# Altium PCB D.PcbDoc
Units mil, origin at the board's own origin, x right, y up, seen from the top; angles counter-clockwise.
Board outline 3945 x 3690 mil, 2 copper layers (Top Layer, Bottom Layer); 79 components, 105 nets, 365 pads, 0 vias.
Unrouted connection lines stored in the file: 229.
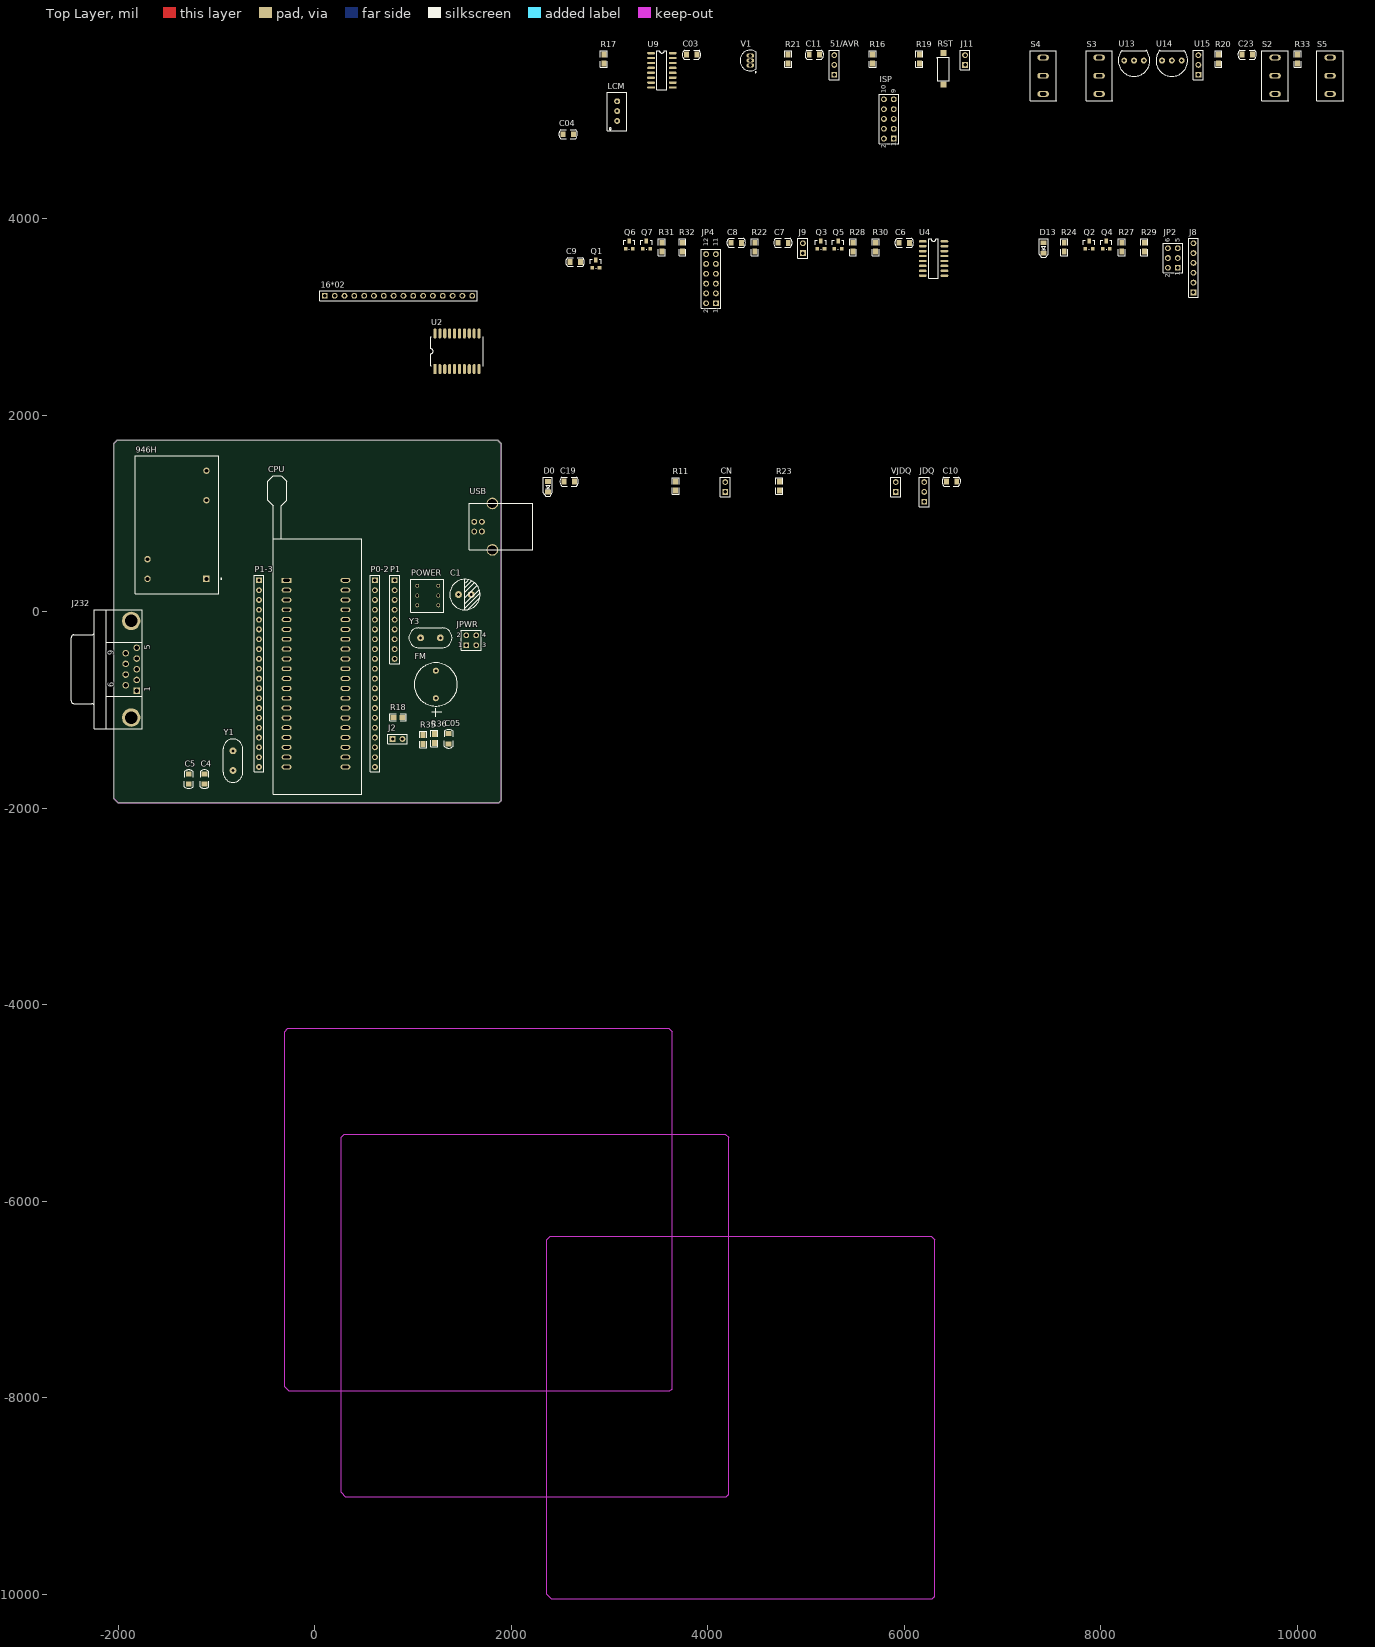
[diagram p0: Top Layer view]
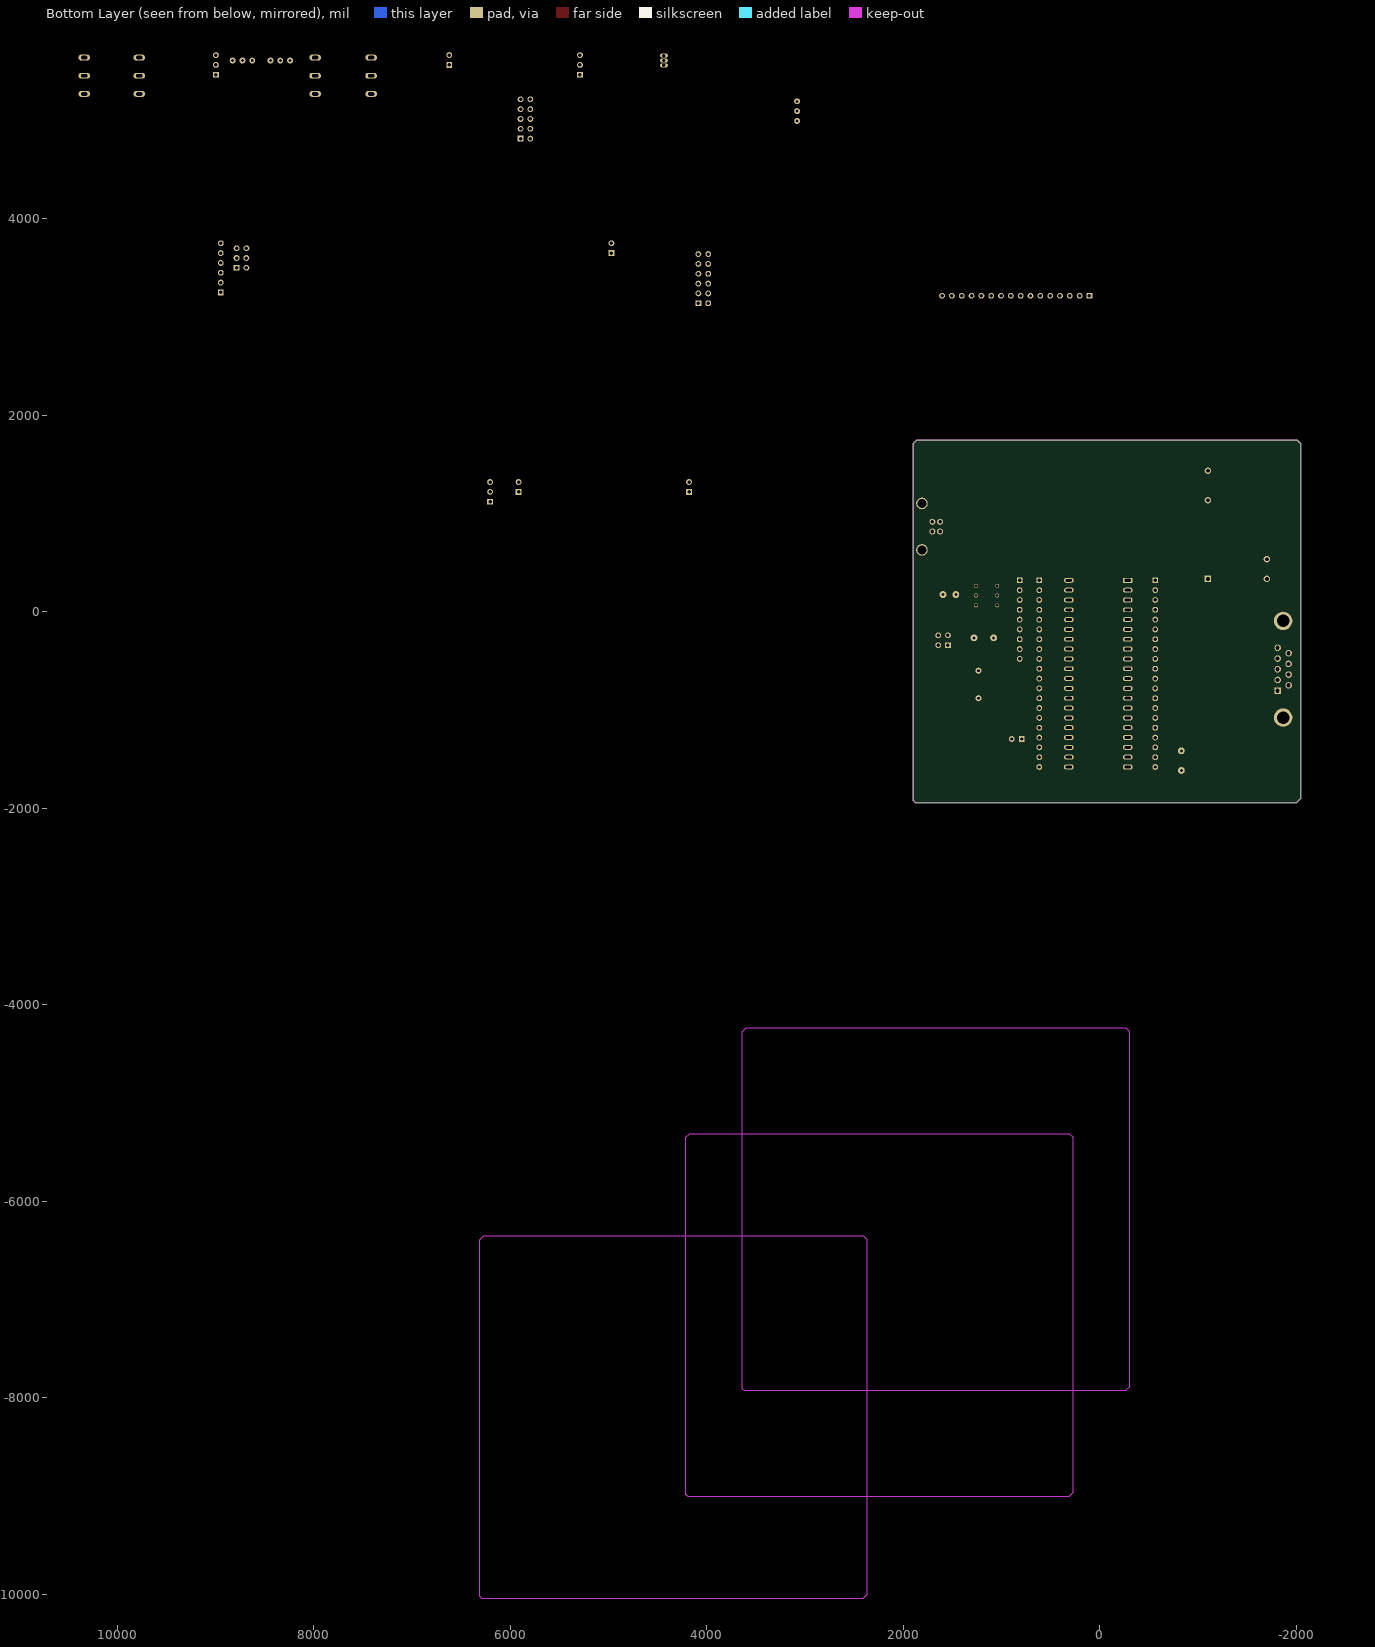
[diagram p1: Bottom Layer view, seen from below]

## Layer stack, top to bottom
Top Layer: signal copper 1.4
Dielectric: dielectric 12.6, FR-4, Dk 4.8
Bottom Layer: signal copper 1.4

## Board outline
-2010,1745 1865,1745 1900,1710 1900,-1925 1895,-1925 1875,-1945 -2000,-1945 -2045,-1900 -2045,1710 -2010,1745

## Design rules (kind name [scope] priority, off if disabled: settings)
Clearance [All] p1: gap=10
PolygonConnect [All] p1: connectstyle=Relief reliefconductorwidth=10 reliefentries=4 polygonreliefangle="90 Angle" airgapwidth=10
RoutingVias [All] p1: holewidth=28 width=50 viastyle="Through Hole" minholewidth=28 minwidth=50 maxholewidth=28 maxwidth=50
SolderMaskExpansion [All] p1: expansion=4
Width [All] p1: maxlimit=10 minlimit=10 preferedwidth=10
28 further rules are at their usual default settings.

## Components (designator, comment, footprint, x,y, rotation, side; value= is the part's Value field where it differs from the comment)
16*02 "Header 16" HDR1X16 105,3215 r0 top
51/AVR "CON3" HDR1X3 5290,5465 r90 top
946H "946H" MODULE5B -1400,885 r90 top
C1 "CAPD" RB470U 1530,175 r0 top
C03 "22" 0805C 3785,5670 r0 top
C4 "22" 0805C -1120,-1755 r90 top
C04 "22" 0805C 2530,4860 r0 top
C5 "22" 0805C -1280,-1755 r90 top
C05 "104" 0805C 1365,-1345 r90 top
C6 "" 0805C 5950,3755 r0 top
C7 "" 0805C 4715,3755 r0 top
C8 "" 0805C 4240,3755 r0 top
C9 "" 0805C 2600,3560 r0 top
C10 "" 0805C 6430,1325 r0 top
C11 "104" 0805C 5035,5670 r0 top
C19 "" 0805C 2540,1325 r0 top
C23 "104" 0805C 9440,5670 r0 top
CN "DC_JACK" HDR1X2 4180,1220 r90 top
CPU "AT89C51" DIP40紧锁座 -285,320 r0 top
D0 "POW_LED" 0805-LED 2375,1325 r90 top
D13 "LED" 0805-LED 7420,3755 r90 top
FM "BELL" BELL 1235,-880 r270 top
ISP "Header 5X2" HDR2X5 5895,4815 r90 top
J2 "CON2" HDR1X2 795,-1295 r0 top
J8 "MOTO1" HDR1X6 8945,3250 r90 top
J9 "MOTO2" HDR1X2 4970,3650 r90 top
J11 "HW" HDR1X2 6620,5565 r90 top
J232 "DB 9" DSUB1.385-2H9 -2240,-585 r90 top
JDQ "A COM B" HDR1X3 6205,1120 r90 top
JP2 "COM" HDR2X3 8785,3500 r90 top
JP4 "Header 6X2" HDR2X6 4085,3140 r90 top
JPWR "Header 2X2" HDR2X2 1545,-340 r0 top
LCM "滑动变阻器" 滑动变阻器 3080,4995 r90 top
P0-2 "CON20" HDR1X20 615,320 r270 top
P1 "10k" HDR1X9 815,320 r270 top
P1-3 "CON20" HDR1X20 -565,320 r270 top
POWER "自锁开关" 自锁开关 1045,265 r0 top
Q1 "8550" SOT-23 2825,3500 r0 top
Q2 "9012" SOT-23 7845,3695 r0 top
Q3 "9012" SOT-23 5115,3695 r0 top
Q4 "9012" SOT-23 8020,3695 r0 top
Q5 "9012" SOT-23 5290,3695 r0 top
Q6 "9012" SOT-23 3165,3695 r0 top
Q7 "9012" SOT-23 3340,3695 r0 top
R11 "1K" 0805 3675,1235 r90 top
R16 "470" 0805 5680,5580 r90 top
R17 "10K" 0805 2945,5580 r90 top
R18 "1k" 0805 895,-1075 r180 top
R19 "10k" 0805 6155,5580 r90 top
R20 "10k" 0805 9200,5580 r90 top
R21 "1K" 0805 4820,5580 r90 top
R22 "20R" 0805 4480,3665 r90 top
R23 "20R" 0805 4730,1235 r90 top
R24 "1K" 0805 7630,3665 r90 top
R27 "20R" 0805 8215,3665 r90 top
R28 "20R" 0805 5480,3665 r90 top
R29 "20R" 0805 8445,3665 r90 top
R30 "20R" 0805 5710,3665 r90 top
R31 "20R" 0805 3535,3665 r90 top
R32 "20R" 0805 3745,3665 r90 top
R33 "100" 0805 10005,5580 r90 top
R35 "470" 0805 1105,-1345 r90 top
R36 "470" 0805 1220,-1335 r90 top
RST "SW" SWD 6400,5365 r90 top
S2 "Sa" 拨动开关 9775,5640 r0 top
S3 "Sa" 拨动开关 7985,5640 r0 top
S4 "Sa" 拨动开关 7415,5640 r0 top
S5 "Sa" 拨动开关 10335,5640 r0 top
U2 "74573" SO20W 1225,2470 r90 top
U4 "MAX232" SO-16 6190,3770 r0 top
U9 "CH340G" SO-16 3425,5685 r0 top
U13 "DS18B20" DS18B20 8240,5610 r0 top
U14 "DS18B20" DS18B20 8625,5610 r0 top
U15 "HONGWAI" HDR1X3 8995,5465 r90 top
USB "USB" USB-B 1625,915 r180 top
V1 "NPN" TO-226-AA 4435,5610 r0 top
VJDQ "CON2" HDR1X2 5915,1220 r90 top
Y1 "CRYSTAL" XTAL -830,-1515 r90 top
Y3 "12MHZ" XTAL 1180,-265 r180 top

## Footprints (in the part's own frame and the unit in brackets; to place one, negate y for a bottom-side part, rotate by r counter-clockwise, add the part's x,y. Pads: shape width x height; smd on the part's side, far side on the other; paste and mask are expansions set on the pad)
0805 [mil]
  rect 60x50 smd: 1(0,0) 2(90,0)
  silkscreen extent -40,-35 130,35
0805-LED [mm]
  rect 1.2x1.5 smd: 1(0,0) 2(-2.686,0)
  silkscreen extent -3.76,-1.14 1.07,1.14
0805C [mil]
  rect 50x60 smd: 1(0,0) 2(105.71,-0.32)
  silkscreen extent -43,-45 146,45
BELL [mil]
  round 62 hole 28: 1(0,0) 2(-280,0)
  silkscreen extent -360,-220 188,220
DIP40紧锁座 [mil]
  rect 100x50 hole 30 slot 62.99 at 0 deg: 1(0,0)
  oval 100x50 hole 25 slot 62.99 at 0 deg: 2(0,-100) 3(0,-200) 4(0,-300) 5(0,-400) 6(0,-500) 7(0,-600) 8(0,-700) 9(0,-800) 10(0,-900) 11(0,-1000) 12(0,-1100) 13(0,-1200) 14(0,-1300) 15(0,-1400) 16(0,-1500) 17(0,-1600) 18(0,-1700) 19(0,-1800) 20(0,-1900) 21(600,-1900) 22(600,-1800) 23(600,-1700) 24(600,-1600) 25(600,-1500) 26(600,-1400) 27(600,-1300) 28(600,-1200) 29(600,-1100) 30(600,-1000) 31(600,-900) 32(600,-800) 33(600,-700) 34(600,-600) 35(600,-500) 36(600,-400) 37(600,-300) 38(600,-200) 39(600,-100) 40(600,0)
  silkscreen extent -190,-2175 765,1065
DS18B20 [mil]
  round 60 hole 30: 1(200,0) 2(100,0) 3(0,0)
  silkscreen extent -61,-161 261,103
DSUB1.385-2H9 [mm] "Connector; D Subminiature; 9 Position; Right Angle; Pitch 1.385 mm"
  rect 1.69x1.69 hole 1.09: 1(-5.54,-10.92)
  round 1.69 hole 1.09: 2(-2.77,-10.92) 3(0,-10.92) 4(2.77,-10.92) 5(5.54,-10.92) 6(-4.155,-8.08) 7(-1.385,-8.08) 8(1.385,-8.08) 9(4.155,-8.08)
  round 4.76 hole 3.26: 10(-12.495,-9.5) 11(12.495,-9.5)
  silkscreen extent -15.4,-12.4 15.4,6
HDR1X2 [mm] "Connector; Header; 2 Position"
  rect 1.5x1.5 hole 0.9: 1(0,0)
  round 1.5 hole 0.9: 2(2.54,0)
  silkscreen extent -1.27,-1.27 3.81,1.27
HDR1X3 [mm] "Connector; Header; 3 Position"
  rect 1.5x1.5 hole 0.9: 1(0,0)
  round 1.5 hole 0.9: 2(2.54,0) 3(5.08,0)
  silkscreen extent -1.27,-1.27 6.35,1.27
HDR1X6 [mm] "Connector; Header; 6 Position"
  rect 1.5x1.5 hole 0.9: 1(0,0)
  round 1.5 hole 0.9: 2(2.54,0) 3(5.08,0) 4(7.62,0) 5(10.16,0) 6(12.7,0)
  silkscreen extent -1.27,-1.27 13.97,1.27
HDR1X9 [mm] "Connector; Header; 9 Position"
  rect 1.5x1.5 hole 0.9: 1(0,0)
  round 1.5 hole 0.9: 2(2.54,0) 3(5.08,0) 4(7.62,0) 5(10.16,0) 6(12.7,0) 7(15.24,0) 8(17.78,0) 9(20.32,0)
  silkscreen extent -1.27,-1.27 21.59,1.27
HDR1X16 [mm] "Connector; Header; 16 Position"
  rect 1.5x1.5 hole 0.9: 1(0,0)
  round 1.5 hole 0.9: 2(2.54,0) 3(5.08,0) 4(7.62,0) 5(10.16,0) 6(12.7,0) 7(15.24,0) 8(17.78,0) 9(20.32,0) 10(22.86,0) 11(25.4,0) 12(27.94,0) 13(30.48,0) 14(33.02,0) 15(35.56,0) 16(38.1,0)
  silkscreen extent -1.27,-1.27 39.37,1.27
HDR1X20 [mm] "Connector; Header; 20 Position"
  rect 1.5x1.5 hole 0.9: 1(0,0)
  round 1.5 hole 0.9: 2(2.54,0) 3(5.08,0) 4(7.62,0) 5(10.16,0) 6(12.7,0) 7(15.24,0) 8(17.78,0) 9(20.32,0) 10(22.86,0) 11(25.4,0) 12(27.94,0) 13(30.48,0) 14(33.02,0) 15(35.56,0) 16(38.1,0) 17(40.64,0) 18(43.18,0) 19(45.72,0) 20(48.26,0)
  silkscreen extent -1.27,-1.27 49.53,1.27
HDR2X2 [mm] "Connector; Header; 2x2 Position"
  rect 1.5x1.5 hole 0.9: 1(0,0)
  round 1.5 hole 0.9: 2(0,2.54) 3(2.54,0) 4(2.54,2.54)
  silkscreen extent -1.27,-1.27 3.81,3.81
HDR2X3 [mm] "Connector; Header; 3x2 Position"
  rect 1.5x1.5 hole 0.9: 1(0,0)
  round 1.5 hole 0.9: 2(0,2.54) 3(2.54,0) 4(2.54,2.54) 5(5.08,0) 6(5.08,2.54)
  silkscreen extent -1.27,-1.27 6.35,3.81
HDR2X5 [mm] "Connector; Header; 5x2 Position"
  rect 1.5x1.5 hole 0.9: 1(0,0)
  round 1.5 hole 0.9: 2(0,2.54) 3(2.54,0) 4(2.54,2.54) 5(5.08,0) 6(5.08,2.54) 7(7.62,0) 8(7.62,2.54) 9(10.16,0) 10(10.16,2.54)
  silkscreen extent -1.27,-1.27 11.43,3.81
HDR2X6 [mm] "Connector; Header; 6x2 Position"
  rect 1.5x1.5 hole 0.9: 1(0,0)
  round 1.5 hole 0.9: 2(0,2.54) 3(2.54,0) 4(2.54,2.54) 5(5.08,0) 6(5.08,2.54) 7(7.62,0) 8(7.62,2.54) 9(10.16,0) 10(10.16,2.54) 11(12.7,0) 12(12.7,2.54)
  silkscreen extent -1.27,-1.27 13.97,3.81
MODULE5B [mm] "DIP; 5 Round Pins; Row Space 15.24 mm; Pitch 2.54 mm"
  rect 1.65x1.65 hole 1: 1(-13.97,-7.62)
  round 1.65 hole 1: 2(-13.97,7.62) 3(-8.89,7.62) 4(13.97,-7.62) 5(6.35,-7.62)
  silkscreen extent -17.8,-11.58 17.8,10.8, body extent -17.8,-10.8 17.8,10.8, height 14
RB470U [mil]
  round 70 hole 30: 1(-65,0) 2(65,0)
  silkscreen extent -155,-155 155,155
SO20W [mm]
  rect 2.6x0.8 smd: 1(0,0)
  oval 2.6x0.8 smd: 2(0,-1.27) 3(0,-2.54) 4(0,-3.81) 5(0,-5.08) 6(0,-6.35) 7(0,-7.62) 8(0,-8.89) 9(0,-10.16) 10(0,-11.43) 11(9.2,-11.43) 12(9.2,-10.16) 13(9.2,-8.89) 14(9.2,-7.62) 15(9.2,-6.35) 16(9.2,-5.08) 17(9.2,-3.81) 18(9.2,-2.54) 19(9.2,-1.27) 20(9.2,0)
  silkscreen extent 0.8,-12.51 8.4,1.09
SO-16 [mil]
  oval 80x24 smd: 1(0,0) 2(0,-50) 3(0,-100) 4(0,-150) 5(0,-200) 6(0,-250) 7(0,-300) 8(0,-350) 9(220,-350) 10(220,-300) 11(220,-250) 12(220,-200) 13(220,-150) 14(220,-100) 15(220,-50) 16(220,0)
  silkscreen extent 60,-375 160,25
SOT-23 [mil]
  rect 36x36 smd: 1(0,0) 2(75,0)
  rect 36x50 smd: 3(38,80)
  silkscreen extent -20,-5 95,85
SWD [mil]
  rect 60x60 smd: 1(-0.4,0.5) 2(319.6,0.5)
  silkscreen extent 40,-60 280,61
TO-226-AA [mm] "TO, Flat Index; 3 In-Line, Axial Leads; Body Dia. 4.8mm; Leads 0.55 x 0.51 mm (max)"
  oval 2x1 hole 0.9: 1(0,-1.27) 2(0,0) 3(0,1.27)
  silkscreen extent -2.65,-3.13 1.52,2.65, body extent -2.66,-2.66 1.52,2.66, height 5.33
USB-B [mm]
  round 1.524 hole 0.92: 1(0,0) 2(0,2.5) 3(-2,2.5) 4(-2,0)
  round 3 hole 2.4: 5(-4.7,7.25) 6(-4.7,-4.75)
  silkscreen extent -15.15,-4.75 1.22,7.25
XTAL [mil]
  round 70 hole 30: 1(-100,0) 2(100,0)
  silkscreen extent -220,-100 220,100
拨动开关 [mm]
  oval 3x1.5 hole 0.9 slot 1.6 at 0 deg: 1(0,0) 2(0,-4.7) 3(0,-9.4)
  silkscreen extent -3.38,-11.23 3.37,1.78
滑动变阻器 [mil]
  round 60 hole 30: 1(0,0) 2(100,0) 3(200,0)
  silkscreen extent -100,-100 290,100
自锁开关 [mm]
  round 1 hole 0.7: 1(0,0) 2(5.45,0) 3(0,-2.54) 4(5.45,-2.54) 5(0,-5.08) 6(5.45,-5.08)
  silkscreen extent -1.7,-6.8 6.8,1.7

## Part data
16*02: "Header, 16-Pin"
51/AVR JDQ U15: library part "Header 3", "Header, 3-Pin"
946H: library part Relay, "SPDT Relay"
C03 C4 C04 C5 C05 C6 C7 C8 C9 C10 C11 C19 C23: library part CAP, "C"
CN J2 J9 J11 VJDQ: library part "Header 2", "Header, 2-Pin"
D0: library part LED
ISP: "Header, 5-Pin, Dual row"
J8: library part "Header 6", "Header, 6-Pin"
J232: library part "D Connector 9", "Receptacle Assembly, 9 Position, Right Angle"
JP2: library part "Header 3X2H", "Header, 3-Pin, Dual row, Right Angle"
JP4: "Header, 6-Pin, Dual row"
JPWR: "Header, 2-Pin, Dual row"
P0-2 P1-3: library part "Header 20", "Header, 20-Pin"
P1: library part "Header 9", "Header, 9-Pin"
Q1 Q2 Q3 Q4 Q5 Q6 Q7: library part PNP
R11 R16 R17 R18 R19 R20 R21 R22 R23 R24 R27 R28 R29 R30 R31 R32 R33 R35 R36: library part R1, "R?"
S2 S3 S4 S5: library part SW2
U9: "USB2UART"
V1: "NPN Bipolar Transistor"
Y3: library part CRYSTAL

## Nets (pads, with @x,y where several pads share a name; then routed paths per layer and width w, separated by ;. In a path a pad name is that pad's centre, name@x,y a point inside that pad or via, vN(x,y) a via of type N, cw(c..) or ccw(c..) an arc to the next point about the centre after c; other vN are vias at no path point)
ALE: CPU.30 P0-2.11
D0: 16*02.7 CPU.39 P0-2.2 P1.2 U2.2
D1: 16*02.8 CPU.38 P0-2.3 P1.3 U2.3
D2: 16*02.9 CPU.37 P0-2.4 P1.4 U2.4
D3: 16*02.10 CPU.36 P0-2.5 P1.5 U2.5
D4: 16*02.11 CPU.35 P0-2.6 P1.6 U2.6
D5: 16*02.12 CPU.34 P0-2.7 P1.7 U2.7
D6: 16*02.13 CPU.33 P0-2.8 P1.8 U2.8
D7: 16*02.14 CPU.32 P0-2.9 P1.9 U2.9
GND: 16*02.1 16*02.16 C1.2 C03.2 C4.1 C04.2 C05.1 C5.1 C9.1 C10.2 C19.1 C23.1 CN.2 CPU.20 D0.2 ISP.4 ISP.6 ISP.8 ISP.10 LCM.1 P1-3.20 Q1.3 Q2.3 Q3.3 Q4.3 Q5.3 Q6.3 Q7.3 R17.1 S2.1 S3.1 S4.1 S5.1 U2.1 U2.10 U4.15 U9.1 U13.1 U14.1 U15.2 USB.4 USB.5 USB.6 V1.3
INT0: CPU.12 J11.1 P1-3.12
INT1: CPU.13 P1-3.13
IO: J11.2 U15.3
LCDEN: 16*02.6 CPU.14 P1-3.14 S2.2
Net946H_1: 946H.1 JDQ.2
Net946H_2: 946H.2 JDQ.1
Net946H_3: 946H.3 JDQ.3
Net946H_5: 946H.5 R23.2
NetC1_1: C1.1 JPWR.2 JPWR.4 POWER.5
NetC05_2: C05.2 U9.4
NetC6_2: C6.2 U4.2
NetC7_1: C7.1 U4.3
NetC7_2: C7.2 U4.1
NetC8_1: C8.1 U4.5
NetC8_2: C8.2 U4.4
NetC9_2: C9.2 U4.6
NetC11_2: C11.2 R16.1 R17.2 R21.1
NetCN_1: CN.1 JPWR.3
NetD0_1: D0.1 R11.1
NetD13_1: D13.1 R24.2
NetFM_1: FM.1 R22.1
NetFM_2: FM.2 Q1.2
NetJ2_2: J2.2 R18.2
NetJ232_2: J232.2 U4.14
NetJ232_3: J232.3 U4.13
NetQ1_1: Q1.1 R18.1
NetQ2_1: Q2.1 R27.2
NetQ3_1: Q3.1 R28.2
NetQ4_1: Q4.1 R29.2
NetQ5_1: Q5.1 R30.2
NetQ6_1: Q6.1 R31.2
NetQ7_1: Q7.1 R32.2
NetR16_2: R16.2 RST.2
NetR21_2: R21.2 V1.2
NetR23_1: R23.1 VJDQ.2
NetR35_2: R35.2 U9.2
NetR36_2: R36.2 U9.3
NetU9_5: U9.5 USB.3
NetU9_6: U9.6 USB.2
NetU13_3: U13.3 U14.3
P3.0: CPU.10 D13.2 JP2.3 P1-3.10
"P3.0 232": JP2.5 U4.12
P3.1: CPU.11 JP2.4 P1-3.11
"P3.1 232": JP2.6 U4.11
P10: CPU.1 P1-3.1
P11: CPU.2 P1-3.2
P12: CPU.3 P1-3.3
P13: CPU.4 P1-3.4
P14: CPU.5 P1-3.5
P15: CPU.6 ISP.1 P1-3.6
P16: CPU.7 ISP.9 P1-3.7
P17: CPU.8 ISP.7 P1-3.8
P20: CPU.21 P0-2.20
P21: CPU.22 P0-2.19
P22: CPU.23 P0-2.18 R20.1 U13.2 U14.2
P23: CPU.24 J2.1 P0-2.17
P24: CPU.25 P0-2.16
P25: CPU.26 P0-2.15
P26: CPU.27 P0-2.14
P27: CPU.28 P0-2.13 U2.11
PSEN: CPU.29 P0-2.10
RD: CPU.17 P1-3.17 S5.2
RS: 16*02.4 CPU.15 P1-3.15 S3.2
RST: 51/AVR.2 CPU.9 ISP.5 P1-3.9
RST51: 51/AVR.1
RSTAVR: 51/AVR.3 R19.1 V1.1
USBRX: JP2.2 R36.1
USBTX: JP2.1 R35.1
V: C23.2 R33.1 U15.1
VCC: 16*02.2 16*02.15 C6.1 C10.1 C11.1 C19.2 CPU.31 CPU.40 ISP.2 J8.1 J8.2 J9.2 LCM.2 P0-2.1 P0-2.12 P1.1 POWER.3 R11.2 R19.2 R20.2 R22.2 R24.1 R33.2 RST.1 U2.20 U4.16 USB.1 VJDQ.1
VDD: JPWR.1 U9.16
VO: 16*02.3 LCM.3
WE1: JP4.11 U2.19
WE2: JP4.9 U2.18
WE3: JP4.7 U2.17
WE4: JP4.5 U2.16
WE5: JP4.3 U2.15
WE6: JP4.1 U2.14
WO1: JP4.12 R27.1
WO2: JP4.10 R28.1
WO3: JP4.8 R29.1
WO4: JP4.6 R30.1
WO5: JP4.4 R31.1
WO6: JP4.2 R32.1
WR: 16*02.5 CPU.16 P1-3.16 S4.2
WX1: J8.3 Q2.2
WX2: J8.4 Q3.2
WX3: J8.5 Q4.2
WX4: J8.6 Q5.2
WX5: J9.1 Q6.2
WX6: 946H.4 Q7.2
X1: C5.2 CPU.19 P1-3.19 Y1.1
X2: C4.2 CPU.18 P1-3.18 Y1.2
XI: C04.1 U9.7 Y3.1
XO: C03.1 U9.8 Y3.2
pads on no net: ISP.3 J232.1 J232.4 J232.5 J232.6 J232.7 J232.8 J232.9 J232.10 J232.11 POWER.1 POWER.2 POWER.4 POWER.6 S2.3 S3.3 S4.3 S5.3 U2.12 U2.13 U4.7 U4.8 U4.9 U4.10 U9.9 U9.10 U9.11 U9.12 U9.13 U9.14 U9.15

## Keep-outs
Keep-Out Layer:
  lines w10: -2045,-1900 -2000,-1945 1875,-1945 1895,-1925 1900,-1925 1900,1710 1865,1745 -1990,1745 -2010,1745 -2045,1710 -2045,-1785 -2045,-1900 ; -305,-7885 -260,-7930 3615,-7930 3635,-7910 3640,-7910 3640,-4275 3605,-4240 -250,-4240 -270,-4240 -305,-4275 -305,-7770 -305,-7885 ; 270,-8960 315,-9005 4190,-9005 4210,-8985 4215,-8985 4215,-5350 4180,-5315 325,-5315 305,-5315 270,-5350 270,-8845 270,-8960 ; 2365,-10000 2410,-10045 6285,-10045 6305,-10025 6310,-10025 6310,-6390 6275,-6355 2420,-6355 2400,-6355 2365,-6390 2365,-9885 2365,-10000

## Text inside footprints (layer, text, board x,y; h text height)
ISP: Top Overlay "10" at 5815,5275 h50 r90; Top Overlay "9" at 5915,5275 h50 r90; Top Overlay "1" at 5915,4735 h50 r90; Top Overlay "2" at 5815,4715 h50 r90
J232: Top Overlay "1" at -1674.06,-812.95 h59.06 r90; Top Overlay "5" at -1674.06,-386.57 h59.06 r90; Top Overlay "9" at -2044.13,-441.1 h59.06 r90; Top Overlay "6" at -2044.13,-768.27 h59.06 r90
JP2: Top Overlay "6" at 8705,3760 h50 r90; Top Overlay "5" at 8805,3760 h50 r90; Top Overlay "2" at 8705,3400 h50 r90; Top Overlay "1" at 8805,3420 h50 r90
JP4: Top Overlay "12" at 4005,3720 h50 r90; Top Overlay "1" at 4105,3760 h50 r90; Top Overlay "1" at 4105,3720 h50 r90; Top Overlay "1" at 4105,3040 h50 r90; Top Overlay "2" at 4005,3040 h50 r90
JPWR: Top Overlay "1" at 1465,-360 h50; Top Overlay "2" at 1445,-260 h50; Top Overlay "4" at 1705,-260 h50; Top Overlay "3" at 1705,-360 h50